# Altium PCB FK723MK1_ZGT6_Large.PcbDoc
Units mm, origin at the board's own origin, x right, y up, seen from the top; angles counter-clockwise.
Board outline 115 x 75 mm, 4 copper layers (Top Layer, GND, +3V3, Bottom Layer), stack 1.652 mm thick; 28 components, 122 nets, 212 pads, 26 vias.
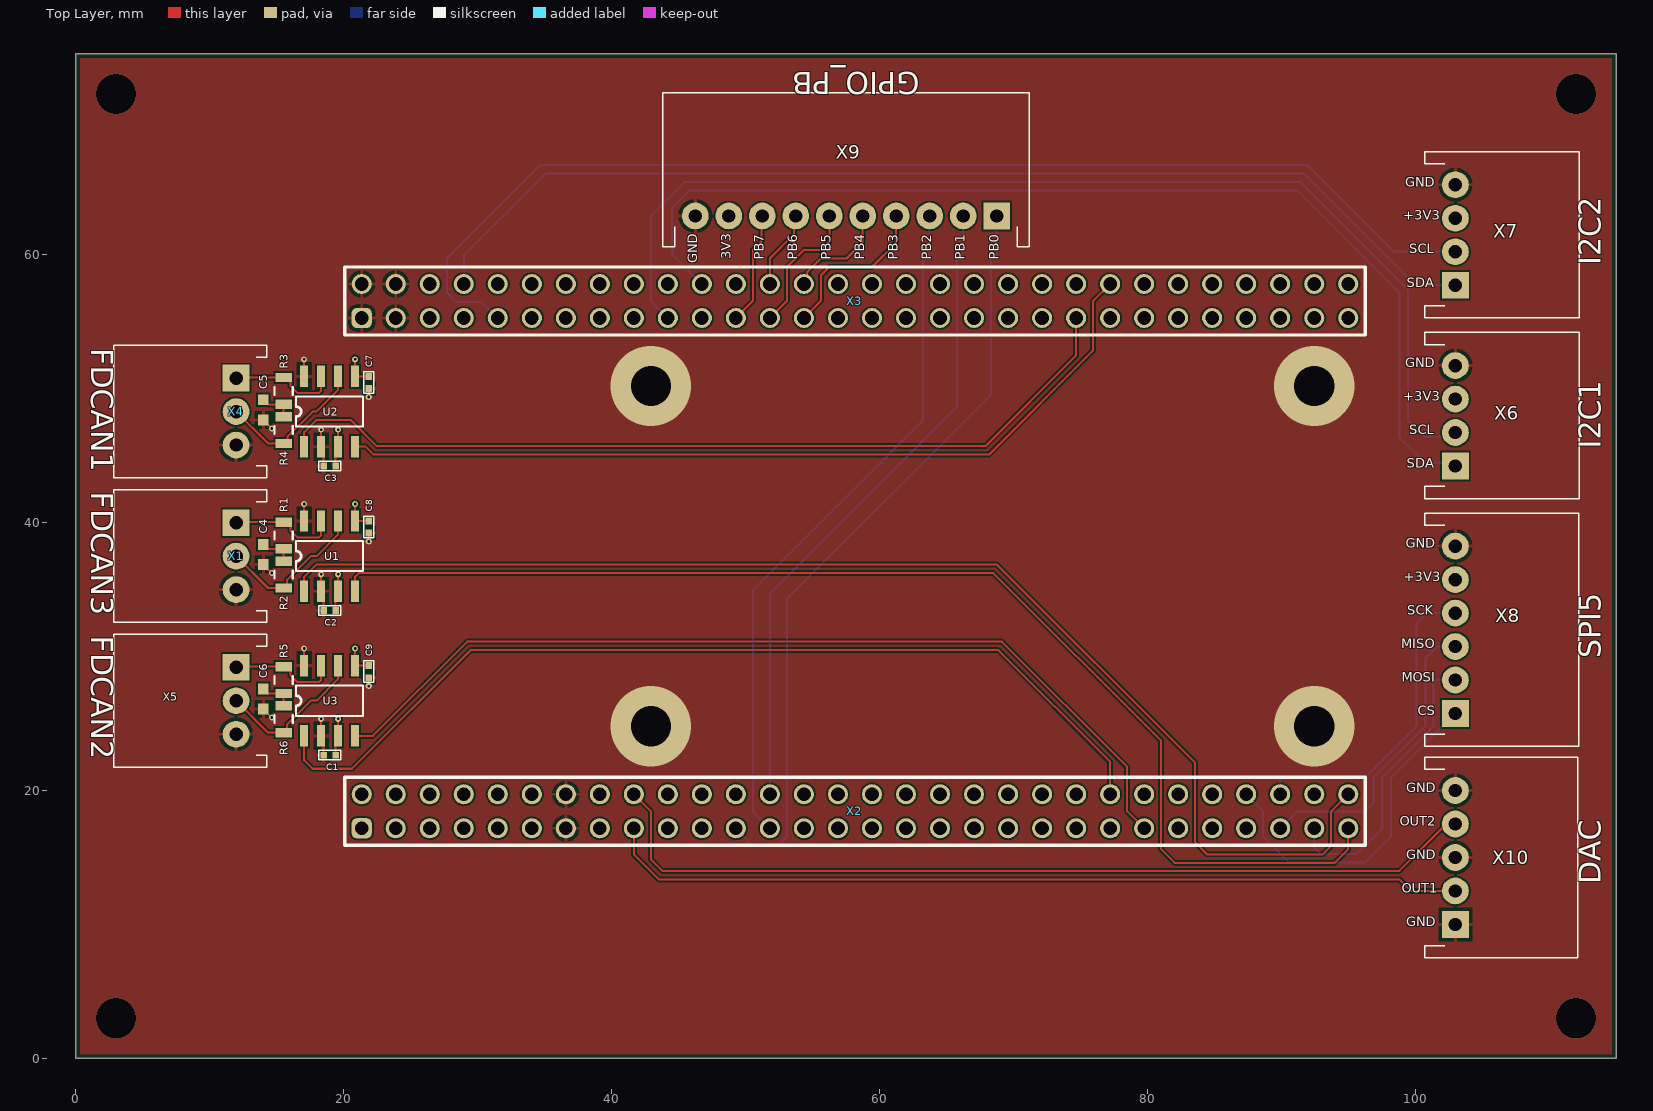
[diagram p0: Top Layer view]
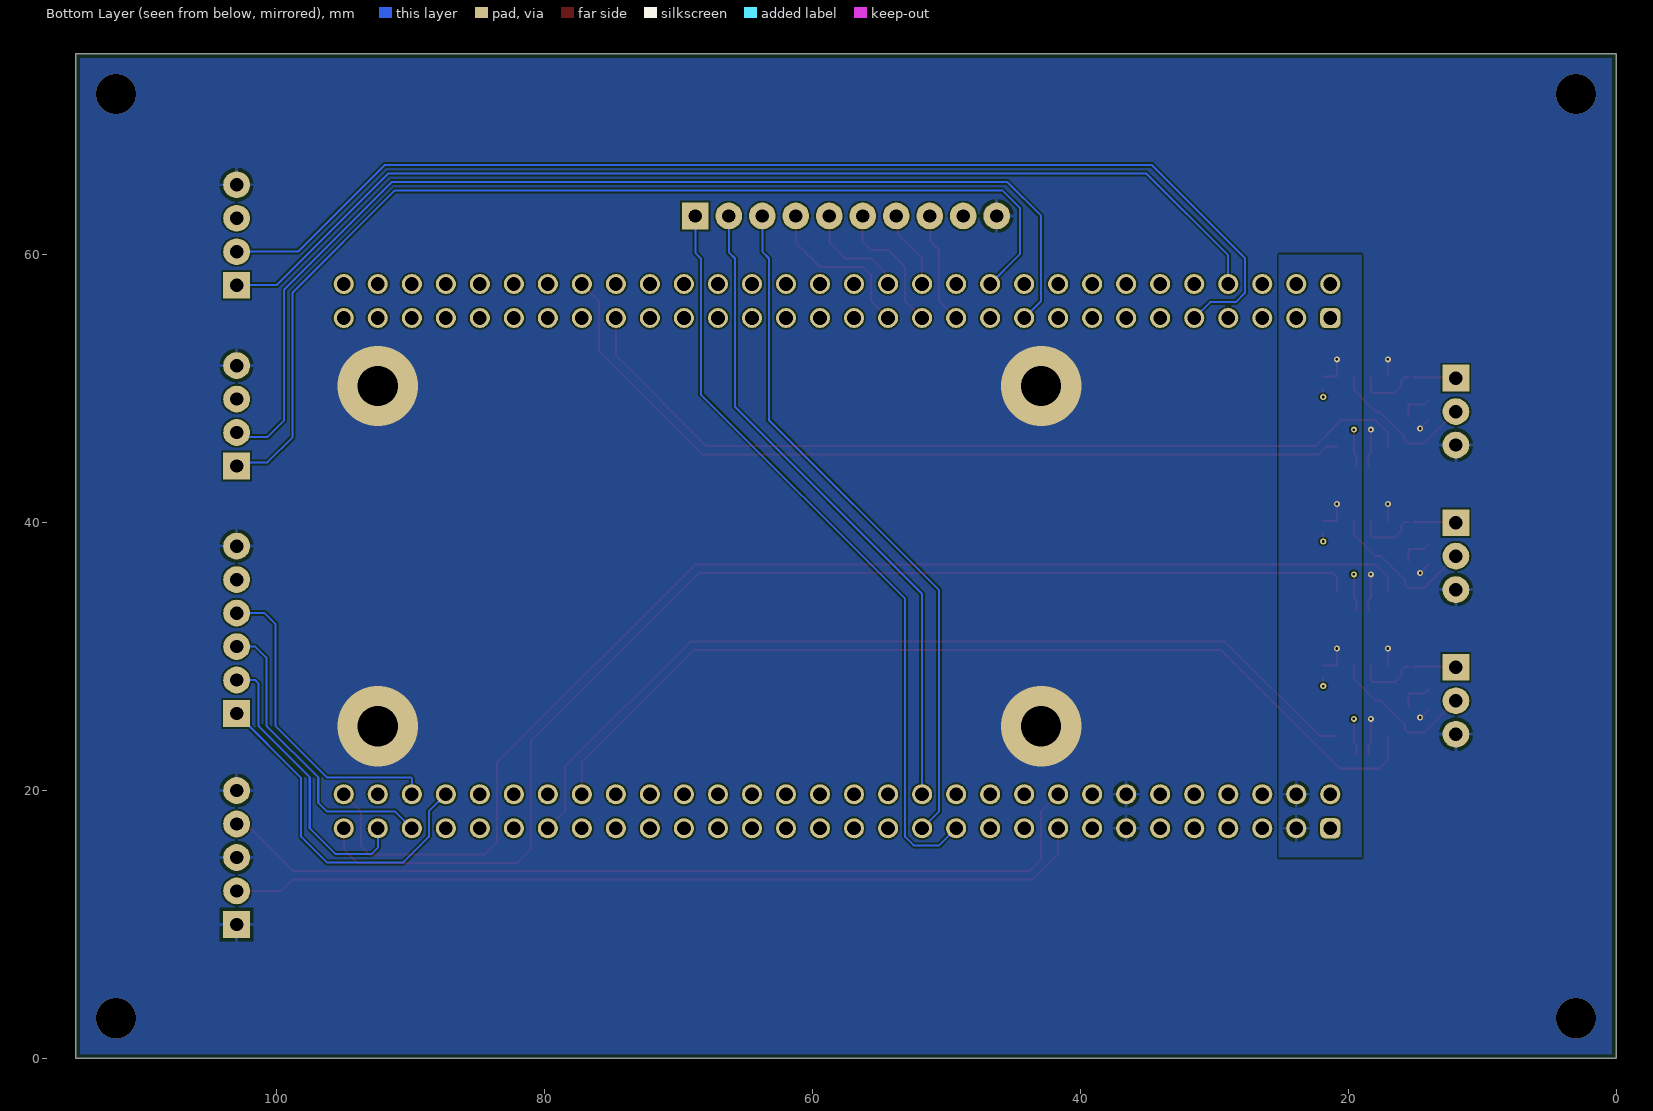
[diagram p1: Bottom Layer view, seen from below]
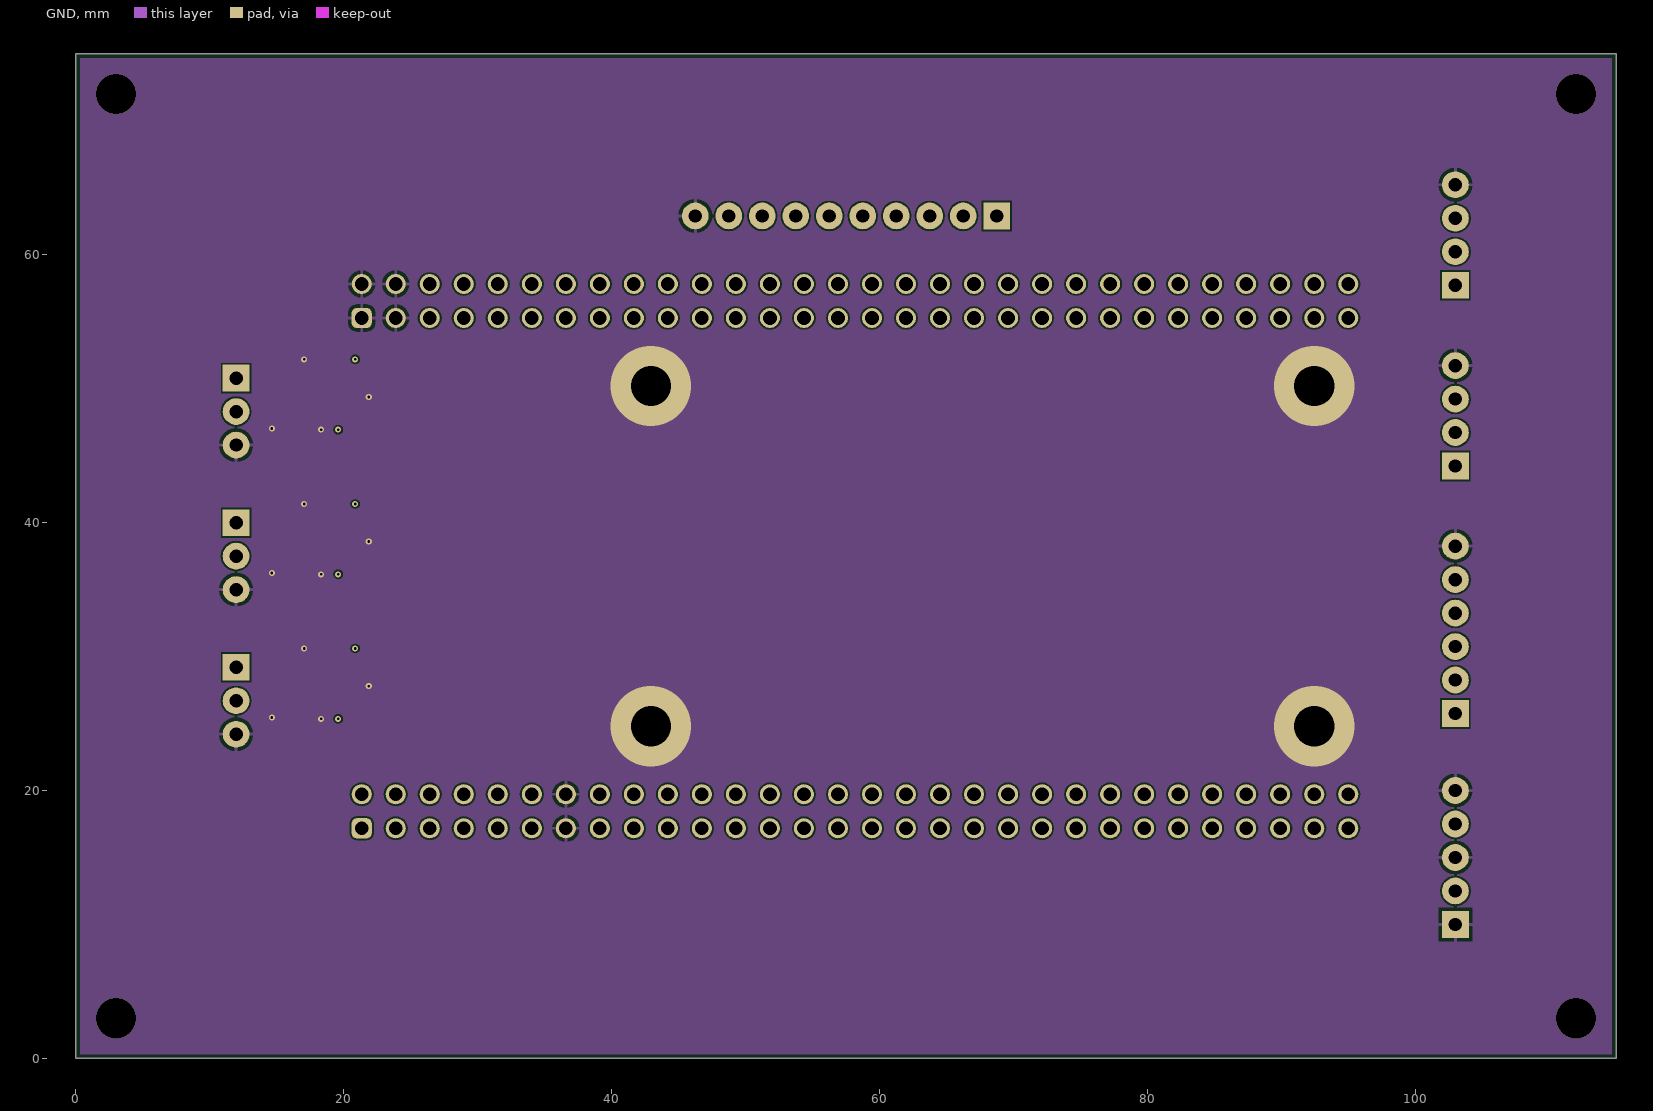
[diagram p2: GND]
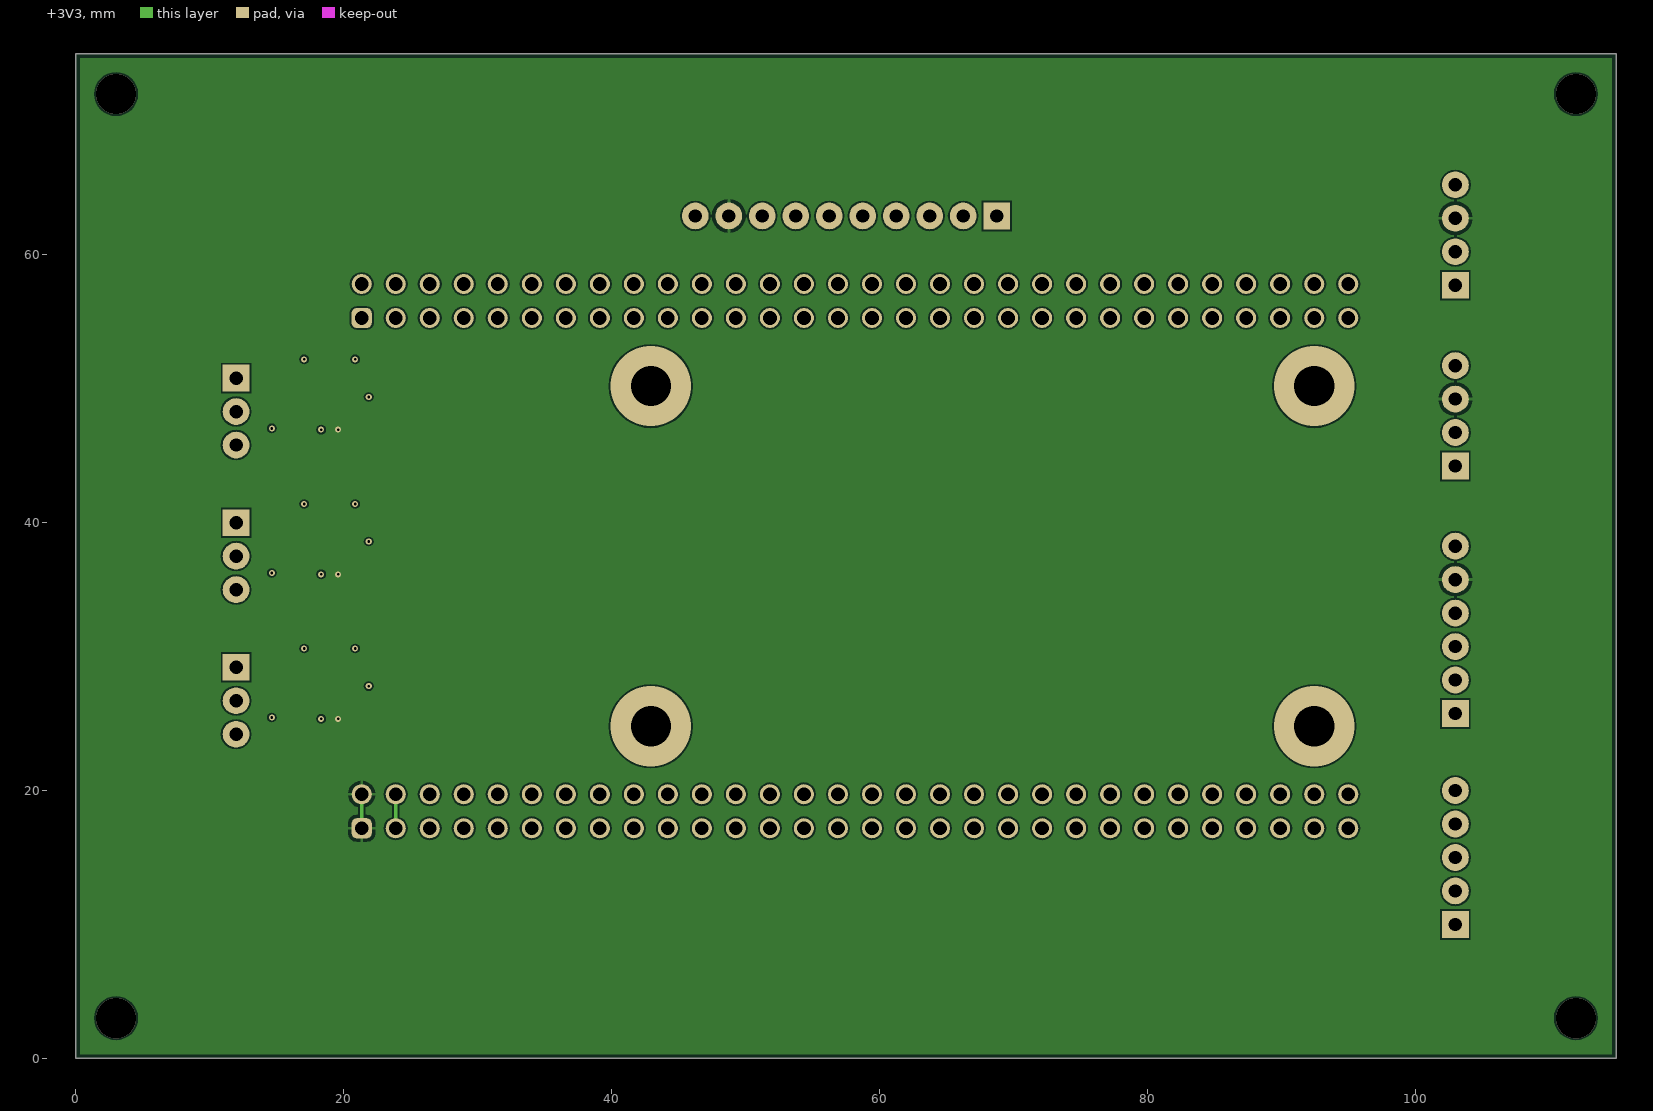
[diagram p3: +3V3]
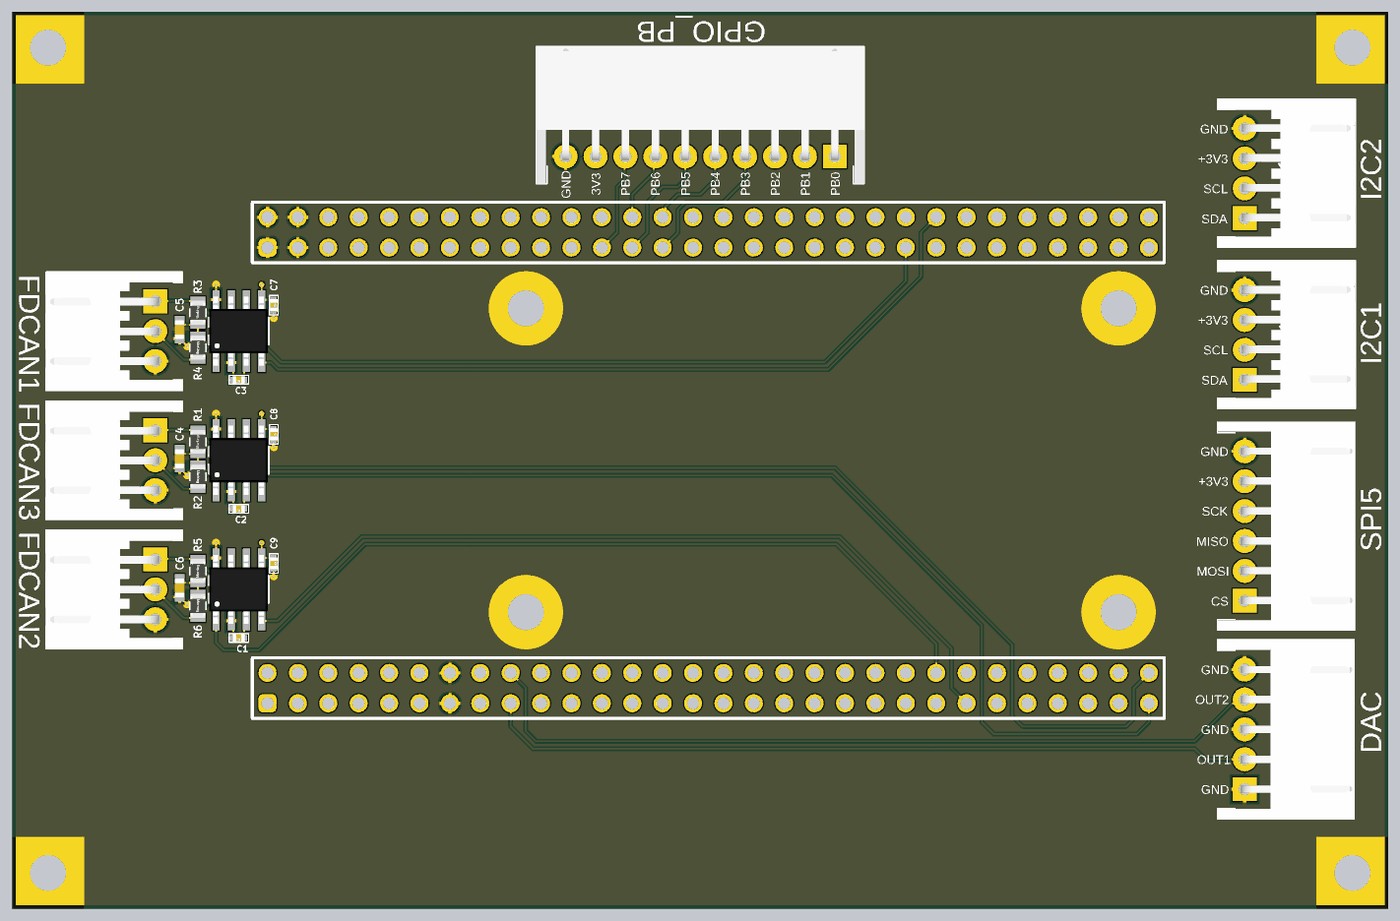
[diagram p4: 3D render of the assembled board from above, using the file's embedded part models]

## Layer stack, top to bottom
Top Solder: solder mask 0.0102, Solder Resist, Dk 3.5
Top Layer: signal copper 0.035
Prepreg 2x1080: core 0.156, FR-4, Dk 4.2
GND: signal copper 0.035
Core: prepreg 1.2, Dk 4.2
+3V3: signal copper 0.035
Prepreg 2x1080: core 0.156, Dk 4.2
Bottom Layer: signal copper 0.035
Bottom Solder: solder mask 0.0102, Solder Resist, Dk 3.5

## Board outline
0,0 0,75 115,75 115,0

## Design rules (kind name [scope] priority, off if disabled: settings)
BoardOutlineClearance [All] p1: gap=0.3 ignorepadtopadclearanceinfootprint=FALSE
Clearance [All] p1: gap=0.125 ignorepadtopadclearanceinfootprint=FALSE
FabricationTestPointUsage TestPointUsage [All] p1: valid=0 allowmultiple=FALSE
FabricationTestpoint Testpoint [All] p1: side=3 testpointundercomponent=TRUE minsize=1.016 maxsize=2.54 preferedsize=1.524 minholesize=0 maxholesize=1.016 preferedholesize=0.813 testpointgrid=0.025 allowsidetop=TRUE allowsidebottom=TRUE usegrid=TRUE gridtolerance=0
HoleSize [All] p1: absolutevalues=TRUE maxlimit=5.08 minlimit=0.025 maxpercent=80.000 minpercent=20.000
PolygonConnect PolygonConnect_Via [isVia] p1: connectstyle=Direct reliefconductorwidth=0.254 reliefentries=4 polygonreliefangle="90 Angle" airgapwidth=0.254
PolygonConnect PolygonConnect_Hole [HasFootprint('M2')] p2: connectstyle=Direct reliefconductorwidth=0.254 reliefentries=4 polygonreliefangle="90 Angle" airgapwidth=0.254
PolygonConnect [All] p3: connectstyle=Relief reliefconductorwidth=0.254 reliefentries=4 polygonreliefangle="90 Angle" airgapwidth=0.254
RoutingVias [All] p1: holewidth=0.4 width=0.8 viastyle="Through Hole" minholewidth=0.4 minwidth=0.8 maxholewidth=0.8 maxwidth=1.27
SilkToSolderMaskClearance SilkscreenOverComponentPads [IsPad] p1: minsilkscreentomaskgap=0.254 clearancetoexposedcopper=TRUE
SolderMaskExpansion [All] p1: expansion=0.102 istentingtop=FALSE
SupplyNets "Schematic Supply Nets_8" [InNet('FDCAN3_RX')] p1: voltage=0.000
SupplyNets "Schematic Supply Nets_7" [InNet('FDCAN3_TX')] p2: voltage=0.000
SupplyNets "Schematic Supply Nets_6" [InNet('FDCAN1_RX')] p3: voltage=0.000
SupplyNets "Schematic Supply Nets_5" [InNet('FDCAN1_TX')] p4: voltage=0.000
SupplyNets "Schematic Supply Nets_4" [InNet('FDCAN2_TX')] p5: voltage=0.000
SupplyNets "Schematic Supply Nets_3" [InNet('FDCAN2_RX')] p6: voltage=0.000
SupplyNets "Schematic Supply Nets_2" [InNet('+5V0')] p7: voltage=0.000
SupplyNets "Schematic Supply Nets_1" [InNet('+3V3')] p8: voltage=0.000
SupplyNets "Schematic Supply Nets" [InNet('GND')] p9: voltage=0.000
UnpouredPolygon [All] p1: allowunpoured=TRUE
Width [All] p1: maxlimit=2 minlimit=0.125 preferedwidth=0.254 minimp=50.000000 maximp=50.000000 favimp=50.000000
25 further rules are at their usual default settings.

## Components (designator, comment, footprint, x,y, rotation, side; value= is the part's Value field where it differs from the comment)
C1 "100nF" 0402 18.945,22.641 r180 top
C2 "100nF" 0402 18.945,33.436 r180 top
C3 "100nF" 0402 18.945,44.231 r180 top
C4 "1nF" WCAP-CSGP_0603_L1.6W0.8H0.8_Reflow 13.992,37.627 r90 top
C5 "1nF" WCAP-CSGP_0603_L1.6W0.8H0.8_Reflow 13.992,48.422 r90 top
C6 "1nF" WCAP-CSGP_0603_L1.6W0.8H0.8_Reflow 13.992,26.832 r90 top
C7 "100nF" 0402 21.866,50.47 r270 top
C8 "100nF" 0402 21.866,39.675 r270 top
C9 "100nF" 0402 21.866,28.88 r270 top
R1 "60R" WRIS-KSKE_0805 15.516,39.04 r90 top
R2 "60R" WRIS-KSKE_0805 15.516,36.119 r270 top
R3 "60R" WRIS-KSKE_0805 15.516,49.835 r90 top
R4 "60R" WRIS-KSKE_0805 15.516,46.914 r270 top
R5 "60R" WRIS-KSKE_0805 15.516,28.245 r90 top
R6 "60R" WRIS-KSKE_0805 15.516,25.324 r270 top
U1 "TJA1051T/3" SO-8 18.945,37.5 r0 top locked
U2 "TJA1051T/3" SO-8 18.945,48.295 r0 top locked
U3 "TJA1051T/3" SO-8 18.945,26.705 r0 top locked
X1 "JST_XH 3polig" "JST_XH 3polig, liegend" 11.96,37.5 r270 top locked
X2 "Buchsenleiste 2x30" "Buchsenleiste 2x30polig" 21.34,17.18 r0 top locked
X3 "Buchsenleiste 2x30" "Buchsenleiste 2x30polig" 21.34,55.28 r0 top locked
X4 "JST_XH 3polig" "JST_XH 3polig, liegend" 11.96,48.295 r270 top locked
X5 "JST_XH 3polig" "JST_XH 3polig, liegend" 11.96,26.705 r270 top locked
X6 "JST_XH 4polig liegend" "JST_XH 4polig, liegend" 103,48 r90 top
X7 "JST_XH 4polig liegend" "JST_XH 4polig, liegend" 103,61.5 r90 top
X8 "JST_XH 6polig liegend" "JST_XH 6polig, liegend" 102.999,32 r90 top
X9 "JST_XH 10polig liegend" "JST_XH 10polig, liegend" 57.5,62.9 r180 top
X10 "JST_XH 5polig liegend" "JST_XH 5polig, liegend" 102.999,15 r90 top

## Footprints (in the part's own frame and the unit in brackets; to place one, negate y for a bottom-side part, rotate by r counter-clockwise, add the part's x,y. Pads: shape width x height; smd on the part's side, far side on the other; paste and mask are expansions set on the pad)
0402 [mm] "Chip Capacitor, 2-Leads, Body 3.50x2.50mm, IPC Medium Density"
  rect 0.5x0.5 smd mask+0.05: 1(-0.45,0) 2(0.45,0)
  silkscreen extent -0.81,-0.36 0.81,0.36, body extent -0.5,-0.3 0.5,0.3, height 0.2
"Buchsenleiste 2x30polig" [mm] "Buchsenleiste 2x30polig"
  rrect50% 1.5x1.5 hole 1.02: 1(0,0)
  round 1.5 hole 1.02: 2(0,2.54) 3(2.54,0) 4(2.54,2.54) 5(5.08,0) 6(5.08,2.54) 7(7.62,0) 8(7.62,2.54) 9(10.16,0) 10(10.16,2.54) 11(12.7,0) 12(12.7,2.54) 13(15.24,0) 14(15.24,2.54) 15(17.78,0) 16(17.78,2.54) 17(20.32,0) 18(20.32,2.54) 19(22.86,0) 20(22.86,2.54) 21(25.4,0) 22(25.4,2.54) 23(27.94,0) 24(27.94,2.54) 25(30.48,0) 26(30.48,2.54) 27(33.02,0) 28(33.02,2.54) 29(35.56,0) 30(35.56,2.54) 31(38.1,0) 32(38.1,2.54) 33(40.64,0) 34(40.64,2.54) 35(43.18,0) 36(43.18,2.54) 37(45.72,0) 38(45.72,2.54) 39(48.26,0) 40(48.26,2.54) 41(50.8,0) 42(50.8,2.54) 43(53.34,0) 44(53.34,2.54) 45(55.88,0) 46(55.88,2.54) 47(58.42,0) 48(58.42,2.54) 49(60.96,0) 50(60.96,2.54) 51(63.5,0) 52(63.5,2.54) 53(66.04,0) 54(66.04,2.54) 55(68.58,0) 56(68.58,2.54) 57(71.12,0) 58(71.12,2.54) 59(73.66,0) 60(73.66,2.54)
  silkscreen extent -1.27,-1.27 74.93,3.81
"JST_XH 3polig, liegend" [mm] "JST_XH 3polig, liegend"
  rect 2x2 hole 1: 1(-2.5,0)
  round 2 hole 1: 2(0,0) 3(2.5,0)
  silkscreen extent -4.95,-9.14 4.95,2.29, body extent -4.95,-9.18 4.95,2.33, height 5.72
"JST_XH 4polig, liegend" [mm] "JST_XH 4polig, liegend"
  rect 2x2 hole 1: 1(-3.77,0)
  round 2 hole 1: 2(-1.27,0) 3(1.23,0) 4(3.73,0)
  silkscreen extent -6.2,-9.25 6.2,2.29, body extent -6.2,-9.25 6.2,2.26, height 5.75
"JST_XH 5polig, liegend" [mm] "JST_XH 5polig, liegend"
  rect 2x2 hole 1: 1(-5,0)
  round 2 hole 1: 2(-2.5,0) 3(0,0) 4(2.5,0) 5(5,0)
  silkscreen extent -7.5,-9.14 7.5,2.29, body extent -7.45,-9.17 7.45,2.33, height 6.1
"JST_XH 6polig, liegend" [mm] "JST_XH 6polig, liegend"
  rect 2x2 hole 1: 1(-6.25,0)
  round 2 hole 1: 2(-3.75,0) 3(-1.25,0) 4(1.25,0) 5(3.75,0) 6(6.25,0)
  silkscreen extent -8.7,-9.2 8.7,2.29, body extent -8.68,-9.2 8.72,2.3, height 6.1
"JST_XH 10polig, liegend" [mm] "JST_XH 10polig, liegend"
  rect 2x2 hole 1: 1(-11.25,0)
  round 2 hole 1: 2(-8.75,0) 3(-6.25,0) 4(-3.75,0) 5(-1.25,0) 6(1.25,0) 7(3.75,0) 8(6.25,0) 9(8.75,0) 10(11.25,0)
  silkscreen extent -13.7,-9.2 13.7,2.29, body extent -13.7,-9.22 13.7,2.28, height 6.1
SO-8 [mm]
  rect 0.6x1.6 smd: 1(-1.905,-2.625) 2(-0.635,-2.625) 3(0.635,-2.625) 4(1.905,-2.625) 5(1.905,2.625) 6(0.635,2.625) 7(-0.635,2.625) 8(-1.905,2.625)
  silkscreen extent -2.5,-1.12 2.5,1.13, body extent -2.49,-2.89 2.41,2.89, height 1.45
WCAP-CSGP_0603_L1.6W0.8H0.8_Reflow [mm] "Ceramic Capacitors, body 1.6x0.8mm"
  rect 0.8x0.8 smd: 1(-0.75,0) 2(0.75,0)
  body extent -0.8,-0.4 0.8,0.4, height 0.8
WRIS-KSKE_0805 [mm] "Thick Film Resistors, SMT, body size 2x1.25mm"
  rect 0.7x1.25 smd: 1(-1,0) 2(1,0)
  silkscreen extent -0.3,-0.67 0.3,0.67, body extent -1,-0.62 1,0.63, height 0.6

## Part data
C1 C2 C3 C7 C8 C9: "100nF 16V 10% 0402", Trumpf Nr.=1606554
C4 C5 C6: library part 885012006014, "WCAP-CSGP Multilayer Ceramic Chip Capacitor, General Purpose, size 0603, 1nF, 10V", Capacitance Tolerance=+/-5%, Case/Size Code=0603, Insulation Resistance=10GΩ, Manufacturer="Wurth Elektronik", Max Operating Temperature=125°C, Min Operating Temperature=-55°C, Rated Voltage (DC)=10V, Capacitance=1nF, Category="Multilayer Ceramic Chip Capacitors", Ceramic Type=NP0, ComponentLink1Description="Website Link", ComponentLink1URL=https://www.we-online.com/redexpert/article/885012006014?ad, ComponentLink2Description="Datasheet Link", ComponentLink2URL=https://www.we-online.com/redexpert/spec/885012006014?ad, Height=0.8mm, Length=1.6mm, Manufacturer Part Number=885012006014, Match Code=WCAP-CSGP, Mount="Surface Mount", Packaging="Tape and Reel", Q Factor=1000, Technical Reference=NP00603102J010DFCT10000, Width=0.8mm
R1 R2 R3 R4 R5 R6: library part 560050320001, "WRIS-KSKE Thick Film Resistor, SMT, size 0805, 0.1Ω, 0.33W, +/-1%", Case/Size Code=0805, Manufacturer="Wurth Elektronik", Max Operating Temperature=155°C, Min Operating Temperature=-55°C, Rated Current=1.81A, Rated Power=0.33W, Resistance=0.1Ω, Resistance Tolerance=+/-1%, Temperature Coefficient of Resistance Max=250ppm/°C, Category="Thick Film Resistors", ComponentLink1Description="Website Link", ComponentLink1URL=https://www.we-online.com/redexpert/article/560050320001?ad, ComponentLink2Description="Datasheet Link", ComponentLink2URL=https://www.we-online.com/redexpert/spec/560050320001?ad, Height=0.6mm, Length=2mm, Manufacturer Part Number=560050320001, Match Code=WRIS-KSKE, Mount="Surface Mount", Packaging="Tape and Reel", Width=1.25mm
X6 X7: library part "JST_XH 4polig"
X8: library part "JST_XH 6polig"
X9: library part "JST_XH 10polig"
X10: library part "JST_XH 5polig"

## Via types
v1: diameter 0.45, hole 0.2, Top Layer to Bottom Layer, 18 vias
v2: diameter 6, hole 3, Top Layer to Bottom Layer, 4 vias
v3: diameter 3, hole 3, Top Layer to Bottom Layer, 4 vias

## Nets (pads, with @x,y where several pads share a name; then routed paths per layer and width w, separated by ;. In a path a pad name is that pad's centre, name@x,y a point inside that pad or via, vN(x,y) a via of type N, cw(c..) or ccw(c..) an arc to the next point about the centre after c; other vN are vias at no path point)
+3V3: C1.1 C2.1 C3.1 U1.3 U2.3 U3.3 X2.1 X2.2 X6.3 X7.3 X8.5 X9.9 | length 10.9
  Top Layer w0.15: C1.1 19.395,23.395 19.58,23.58 U3.3 v1(19.58,25.35) ; C2.1 19.395,34.19 19.58,34.375 U1.3 v1(19.58,36.145) ; C3.1 19.395,44.985 19.58,45.17 U2.3 v1(19.58,46.94)
  +3V3 w0.254: X2.1 X2.2
+5V0: C7.1 C8.1 C9.1 U1.5 U2.5 U3.5 X2.3 X2.4 | length 9.4
  Top Layer w0.15: v1(20.85,30.6) U3.5 C9.1 ; v1(20.85,41.395) U1.5 C8.1 ; v1(20.85,52.19) U2.5 C7.1
  +3V3 w0.254: X2.3 X2.4
CANH_3: R1.2 U1.7 X1.1 | length 7.8
  Top Layer w0.15: X1.1@12,40.04 R1.2@15.135,40.04 ; R1.2 15.791,40.04 16.014,39.817 16.014,39.415 16.532,38.897 18.161,38.897 18.31,39.046 U1.7
CANL_3: R2.2 U1.6 X1.2 | length 11.5
  Top Layer w0.15: X1.2 14.341,35.119 15.526,35.119 15.749,35.342 15.749,35.701 17.548,37.5 17.969,37.5 19.562,39.093 19.562,40.107 U1.6
DAC1_OUT1: X2.17 X10.2 | length 64.4
  Top Layer w0.15: X2.17 41.66,15.23 43.52,13.37 98.81,13.37 99.68,12.5 X10.2
DAC1_OUT2: X2.18 X10.4 | length 67.2
  Top Layer w0.15: X2.18@41.668,19.712 42.926,18.454 42.926,14.862 43.783,14.005 98.81,14.005 101.971,17.166 102.665,17.166 X10.4
FDCAN1_RX: U2.4 X3.46 | length 64.1
  Top Layer w0.15: U2.4 21.64,45.67 22.225,45.085 68.178,45.085 75.958,52.864 75.958,56.558 X3.46
FDCAN1_TX: U2.1 X3.43 | length 65.5
  Top Layer w0.15: U2.1 17.04,46.758 17.942,47.66 20.539,47.66 22.479,45.72 67.915,45.72 74.68,52.485 X3.43
FDCAN2_RX: U3.4 X2.47 | length 69.5
  Top Layer w0.15: U3.4 22.175,24.08 29.21,31.115 69.135,31.115 78.49,21.76 78.49,18.45 X2.47
FDCAN2_TX: U3.1 X2.46 | length 71.8
  Top Layer w0.15: U3.1 17.04,22.26 17.675,21.625 20.609,21.625 29.464,30.48 68.872,30.48 77.22,22.132 X2.46
FDCAN3_RX: U1.4 X2.59 | length 91
  Top Layer w0.15: U1.4 20.85,35.976 21.104,36.23 38.104,36.23 67.441,36.23 68.51,36.23 81.03,23.711 81.03,15.617 82.042,14.605 93.98,14.605 95,15.625 X2.59
FDCAN3_TX: U1.1 X2.60 | length 95.2
  Top Layer w0.15: U1.1 17.042,34.877 17.042,35.956 17.951,36.865 34.951,36.865 67.822,36.865 68.774,36.865 83.57,22.069 83.57,16.125 84.455,15.24 93.091,15.24 93.726,15.875 93.726,18.446 X2.60
GND: C1.2 C2.2 C3.2 C4.1 C5.1 C6.1 C7.2 C8.2 C9.2 U1.2 U1.8 U2.2 U2.8 U3.2 U3.8 X1.3 X2.13 X2.14 X3.1 X3.2 X3.3 X3.4 X4.3 X5.3 X6.4 X7.4 X8.6 X9.10 X10.1 X10.3 X10.5 | length 16.6
  Top Layer w0.15: C6.1 v1@14.589,25.485 ; C4.1 v1@14.589,36.28 ; C5.1 v1@14.589,47.075 ; U3.8 v1(17.04,30.6) ; U1.8 v1(17.04,41.395) ; U2.8 v1(17.04,52.19) ; v1(18.31,25.35) U3.2 18.31,23.58 18.495,23.395 C1.2 ; v1(18.31,36.145) U1.2 18.31,34.375 18.495,34.19 C2.2 ; v1(18.31,46.94) U2.2 18.31,45.17 18.495,44.985 C3.2 ; v1(21.866,27.795) C9.2 ; v1(21.866,38.59) C8.2 ; v1(21.866,49.385) C7.2
  other v1: 14.627,25.447 14.627,36.242 14.627,47.037
  other v2: 42.93,24.8 92.46,24.8 42.93,50.2 92.46,50.2
  other v3: 3,3 112,3 3,72 112,72
GPIO_PB0: X2.23 X9.1 | length 57.4
  Bottom Layer w0.15: X2.23 50.55,15.91 52.455,15.91 53.09,16.545 53.09,34.325 68.33,49.565 68.33,59.725 68.75,60.145 X9.1
GPIO_PB1: X2.26 X9.2 | length 49.8
  Bottom Layer w0.15: X2.26 51.82,34.675 65.79,48.645 65.79,59.725 66.25,60.185 X9.2 ; X9.2@65.79,62.22 X9.2@66.25,62.68
GPIO_PB2: X2.25 X9.3 | length 52.4
  Bottom Layer w0.15: X2.25 50.55,18.45 50.55,34.96 63.25,47.66 63.25,49.28 63.25,59.725 63.75,60.225 X9.3 ; X9.3@63.25,62.22 X9.3@63.75,62.72
GPIO_PB3: X3.27 X9.4 | length 12.3
  Top Layer w0.15: X3.27@54.368,55.288 55.63,56.55 55.63,58.455 56.265,59.09 59.44,59.09 61.25,60.9 X9.4
GPIO_PB4: X3.28 X9.5 | length 8
  Top Layer w0.15: X3.28 54.588,58.048 54.588,58.683 55.63,59.725 57.535,59.725 58.75,60.94 X9.5
GPIO_PB5: X3.25 X9.6 | length 10.2
  Top Layer w0.15: X3.25 53.09,56.55 53.09,59.09 54.36,60.36 55.63,60.36 56.25,60.98 X9.6
GPIO_PB6: X3.26 X9.7 | length 5.9
  Top Layer w0.15: X3.26 51.82,59.725 53.614,61.519 53.614,62.764 X9.7
GPIO_PB7: X3.23 X9.8 | length 8.4
  Top Layer w0.15: X3.23 50.55,56.55 50.55,60.36 51.185,60.995 51.185,62.835 X9.8
I2C1_SCL: X3.19 X6.2 | length 83
  Bottom Layer w0.15: X3.19 42.93,56.55 42.93,62.9 45.465,65.435 91.417,65.435 99.445,57.407 99.445,47.66 100.715,46.39 101.978,46.39 101.984,46.396 102.666,46.396 X6.2
I2C1_SDA: X3.22 X6.1 | length 80.4
  Bottom Layer w0.15: X3.22 44.515,60.045 44.515,63.5 45.82,64.805 91.19,64.805 98.81,57.185 98.81,46.39 100.7,44.5 X6.1@103,44.5
I2C2_SCL: X3.9 X7.2 | length 88
  Bottom Layer w0.15: X3.9 30.318,56.462 28.413,56.462 27.69,57.185 27.69,59.725 34.67,66.705 91.943,66.705 98.418,60.23 X7.2
I2C2_SDA: X3.8 X7.1 | length 82.2
  Bottom Layer w0.15: X3.8 28.96,59.96 35.07,66.07 91.68,66.07 100.02,57.73 X7.1
NetC4_2: C4.2 R1.1 R2.1 | length 2.6
  Top Layer w0.15: C4.2 14.329,38.04 R1.1 R2.1
NetC5_2: C5.2 R3.1 R4.1 | length 2.6
  Top Layer w0.15: C5.2 14.329,48.835 R3.1 R4.1
NetC6_2: C6.2 R5.1 R6.1 | length 2.6
  Top Layer w0.15: C6.2 14.329,27.245 R5.1 R6.1
NetR3_2: R3.2 U2.7 X4.1 | length 7.8
  Top Layer w0.15: X4.1 12,50.835 R3.2@15.135,50.835 ; R3.2 15.791,50.835 16.014,50.612 16.014,50.21 16.532,49.692 18.161,49.692 18.31,49.841 U2.7
NetR4_2: R4.2 U2.6 X4.2 | length 11.4
  Top Layer w0.15: X4.2 14.341,45.914 15.526,45.914 15.794,46.182 15.794,46.401 17.676,48.283 17.949,48.283 19.562,49.895 19.562,50.902 U2.6
NetR5_2: R5.2 U3.7 X5.1 | length 7.8
  Top Layer w0.15: X5.1@12,29.245 R5.2@15.135,29.245 ; R5.2 15.791,29.245 16.014,29.022 16.014,28.62 16.532,28.102 18.161,28.102 18.31,28.251 U3.7
NetR6_2: R6.2 U3.6 X5.2 | length 11.5
  Top Layer w0.15: X5.2 14.341,24.324 15.526,24.324 15.749,24.547 15.749,24.906 17.548,26.705 17.969,26.705 19.562,28.298 19.562,29.312 U3.6
PA0: X2.10
PA1: X2.9
PA2: X2.11
PA3: X2.20
PA6: X2.19
PA7: X2.22
PA8: X3.47
PA9: X3.6
PA10: X3.5
PA11: X2.5
PA12: X2.6
PA15: X3.44
PB10: X2.44
PB11: X2.42
PB14: X2.45
PB15: X2.48
PC0: X2.8
PC1: X2.7
PC2_C: X2.15
PC3_C: X2.16
PC4: X2.21
PC5: X2.24
PC6: X3.51
PC7: X3.52
PC8: X3.49
PC9: X3.50
PC10: X3.41
PC11: X3.48
PC12: X3.45
PC13: X3.7
PD2: X3.42
PD3: X3.39
PD4: X3.40
PD5: X3.37
PD6: X3.38
PD7: X3.35
PD8: X2.49
PD9: X2.50
PD10: X2.51
PD11: X2.52
PD14: X3.59
PD15: X3.60
PE0: X3.21
PE1: X3.24
PE2: X3.20
PE3: X3.17
PE4: X3.18
PE5: X3.15
PE6: X3.16
PE7: X2.33
PE8: X2.35
PE9: X2.36
PE10: X2.37
PE11: X2.38
PE12: X2.39
PE13: X2.40
PE14: X2.41
PE15: X2.43
PF2: X3.10
PF3: X3.12
PF4: X3.11
PF5: X3.14
PF10: X2.53
PF11: X2.28
PF12: X2.27
PF13: X2.30
PF14: X2.29
PF15: X2.32
PG0: X2.31
PG1: X2.34
PG2: X3.57
PG3: X3.58
PG4: X3.55
PG5: X3.56
PG6: X2.58
PG7: X3.53
PG8: X3.54
PG9: X3.36
PG10: X3.33
PG11: X3.34
PG12: X3.31
PG13: X3.32
PG14: X3.29
PG15: X3.30
SPI5_MISO: X2.55 X8.3 | length 22.8
  Bottom Layer w0.15: X2.55 91.19,18.45 96.27,18.45 96.905,19.085 96.905,20.977 100.777,24.849 100.777,29.929 101.598,30.75 X8.3
SPI5_MOSI: X2.57 X8.2 | length 21.6
  Bottom Layer w0.15: X2.57 92.46,15.734 92.919,15.275 95.635,15.275 97.54,17.18 97.54,20.99 101.35,24.8 101.35,27.975 101.625,28.25 X8.2
SPI5_SCK: X2.56 X8.4 | length 23.8
  Bottom Layer w0.15: X2.56 89.92,20.902 90.008,20.99 96.27,20.99 100.08,24.8 100.08,32.42 100.91,33.25 X8.4
VBAT: X3.13
VREF: X2.12
~CS: X2.54 X8.1 | length 26
  Bottom Layer w0.15: X2.54 88.65,18.45 88.65,16.545 90.555,14.64 96.27,14.64 98.175,16.545 98.175,20.926 X8.1

## Polygon pours and split planes (outlines as drawn)
GND on Bottom Layer "TOP" (solid, pour order 11): 0,0 0,75 115,75 115,0
+5V0 on Bottom Layer "Bottom Layer-+5V0" (solid, pour order 6): 19,15 19,60 25.175,60 25.175,15
GND on Top Layer "TOP" (solid, pour order 8): 0,0 0,75 115,75 115,0
GND on GND "TOP" (solid, pour order 9): 0,0 0,75 115,75 115,0
+3V3 on +3V3 "TOP" (solid, pour order 10): 0,0 0,75 115,75 115,0

## Silkscreen, mask and mechanical layers (free items; w line width, h text height)
Top Overlay:
  text "GPIO_PB" at 62.992,74.179 h2.8 r180
  text "GND" at 99.268,64.826 h1.2
  text "+3V3" at 99.111,62.337 h1.2
  text "SCL" at 99.538,59.836 h1.2
  text "3V3" at 49.15,59.665 h1.2 r90
  text "PB7" at 51.613,59.614 h1.2 r90
  text "PB6" at 54.122,59.614 h1.2 r90
  text "PB5" at 56.63,59.614 h1.2 r90
  text "PB4" at 59.131,59.614 h1.2 r90
  text "PB3" at 61.64,59.614 h1.2 r90
  text "PB2" at 64.143,59.614 h1.2 r90
  text "PB1" at 66.643,59.614 h1.2 r90
  text "PB0" at 69.152,59.614 h1.2 r90
  text "GND" at 46.651,59.385 h1.2 r90
  text "I2C2" at 114.402,59.217 h2.8 r90
  text "SDA" at 99.379,57.315 h1.2
  text "FDCAN1" at 0.588,53.01 h2.8 r270
  text "GND" at 99.268,51.338 h1.2
  text "+3V3" at 99.111,48.85 h1.2
  text "SCL" at 99.538,46.349 h1.2
  text "I2C1" at 114.402,45.501 h2.8 r90
  text "SDA" at 99.379,43.828 h1.2
  text "FDCAN3" at 0.588,42.316 h2.8 r270
  text "GND" at 99.292,37.858 h1.2
  text "+3V3" at 99.135,35.37 h1.2
  text "SCK" at 99.407,32.869 h1.2
  text "FDCAN2" at 0.588,31.547 h2.8 r270
  text "MISO" at 98.946,30.348 h1.2
  text "SPI5" at 114.402,29.88 h2.8 r90
  text "MOSI" at 98.995,27.848 h1.2
  text "CS" at 100.181,25.348 h1.2
  text "GND" at 99.341,19.608 h1.2
  text "OUT2" at 98.856,17.119 h1.2
  text "GND" at 99.341,14.608 h1.2
  text "DAC" at 114.402,12.989 h2.8 r90
  text "OUT1" at 98.997,12.098 h1.2
  text "GND" at 99.341,9.608 h1.2
  text "2031588" at 237.75,-49.785 h3.81
  text ".DokumentenNrBestueckungsplan" at 181.489,-63.755 h3.81
Bottom Paste:
  rectangle: 0,-69 6,-63
  rectangle: 109,-69 115,-63
Top Solder:
  rectangle: 109,69 115,75
  rectangle: 109,0 115,6
  rectangle: 0,0 6,6
  rectangle: 0,69 6,75
Bottom Solder:
  rectangle: 0,69 6,75
  rectangle: 109,69 115,75
  rectangle: 109,0 115,6
  rectangle: 0,0 6,6
Mechanical 1:
  the board outline again, w0.254
Mechanical 2:
  text "Leiterplattendaten:" at 180.051,138.069 h1.5
  text "Technik: Zweiseitig SMD" at 180.051,131.719 h1.5
  text "Abmessungen: 51mmx42mm" at 180.051,129.179 h1.5
  text "Kontur: gefraest" at 180.051,126.639 h1.5
  text "*.GM1" at 211.801,126.639 h1.5
  text "Basismaterial: FR4, TG150, 1.55mm" at 180.051,124.099 h1.5
  text "Aufbau: 4-Lagen" at 180.051,120.289 h1.5
  text "Oberflaeche: chem. Gold (ENIG)" at 180.051,90.319 h1.5
  text "Vias Tented: Bottomside" at 180.07,86.91 h1.5
  text "Loetstopplack:" at 180.051,83.509 h1.5
  text "Top Layer" at 180.051,80.969 h1.5
  text "*.GTS" at 211.801,80.969 h1.5
  text "Bottom Layer" at 180.051,78.429 h1.5
  text "*.GBS" at 211.801,78.429 h1.5
  text "Bestueckungsdruck:" at 180.051,74.619 h1.5
  text "Top Layer" at 180.051,72.079 h1.5
  text "ja" at 211.801,72.079 h1.5
  text "Bottom Layer" at 180.051,69.539 h1.5
  text "keiner" at 211.801,69.539 h1.5
  text "Bohrdurchmesser min/max: 0.3mm/3.1mm" at 180.051,65.729 h1.5
  text "kleinste Leiterbildstrucktur: 125um" at 180.07,58.91 h1.5
  text "Herstellercode: kein blankes Kupfer" at 180.045,54.865 h1.5
  text "Elektrischer Test: ja" at 180.07,51.91 h1.5
  text "2375847" at 237.813,-43.626 h3.81
  text ".DokumentenNrLeiterplatte" at 181.489,-63.755 h3.81
Mechanical 4:
  drawing of 1156 lines, arcs and shapes, not listed
  text "Kennzeichnung:" at 180.553,37.833 h1.5
  text "Ettikettenmass: 20x7.5" at 180.553,35.293 h1.5
  text "Schrifthoehe: 1.5mm" at 180.553,32.753 h1.5
  text "Format:" at 180.553,30.213 h1.5
  text "1. Zeile: MMMMMMMVVV" at 180.553,27.673 h1.5
  text "2. Zeile: WWJJ/NNN" at 180.553,25.133 h1.5
  text "3. Zeile: AAAAAAAAAA" at 180.502,22.582 h1.5
  text "M: Materialnummer der fertigen Leiterplatte 7stellig" at 180.553,19.774 h1.5
  text "V: Version" at 180.553,17.234 h1.5
  text "W: Kalenderwoche Produktion" at 180.553,14.694 h1.5
  text "J: Produktionsjahr" at 180.553,12.154 h1.5
  text "N: Laufende Nummer der aktuellen Kalenderwoche" at 180.553,9.614 h1.5
  text "A: Bei Bedarf platinenspezifischer Text max. 10 Zeichen" at 180.477,7.124 h1.5
  text "DM: Datamatrixcode 6x6mm Modulgroesse min. 0,2mm" at 180.451,4.777 h1.5
  text "Inhalt: MMMMMMMVVV WWJJ/NNN AAAAAAAAAA" at 186.243,2.364 h1.5
  text "Beispiel:" at 180.451,-0.216 h1.5
  text "Position der Kennzeichnung:" at 181.086,-11.773 h1.5
Mechanical 13:
  lines w0.1: 19,15 19,60 25.175,60 25.175,15 19,15
Mechanical 16:
  drawing of 1687 lines, arcs and shapes, not listed
  text "1" at -99.308,201.04 h1.27
  text "2" at -50.286,201.04 h1.27
  text "3" at -1.264,201.04 h1.27
  text "4" at 47.758,201.04 h1.27
  text "5" at 96.78,201.04 h1.27
  text "6" at 145.802,201.04 h1.27
  text "7" at 194.824,201.04 h1.27
  text "8" at 243.846,201.04 h1.27
  text "A" at -121.406,167.004 h1.27
  text "A" at 267.214,167.004 h1.27
  text "B" at -121.406,96.646 h1.27
  text "B" at 267.214,93.646 h1.27
  text "C" at -121.406,26.288 h1.27
  text "C" at 267.214,26.288 h1.27
  text "DATUM" at 95.002,-36.196 h1.27
  text "NAME" at 116.338,-36.196 h1.27
  text "BENENNUNG" at 168.916,-36.196 h1.27
  text "MATERIAL-NR." at 239.782,-36.196 h1.27
  text "00" at 129.597,-37.047 h2.54
  text "-" at 137.725,-37.047 h2.54
  text "BEAR." at 84.588,-41.022 h1.27
  text "513mk" at 114.611,-41.386 h2.54
  text "19.03.2018" at 93.601,-41.437 h2
  text "D" at -121.406,-44.07 h1.27
  text "D" at 267.214,-44.07 h1.27
  text ".BoardNameAbkuerzung" at 169.17,-44.578 h3.81
  text "GEPR." at 84.842,-45.086 h1.27
  text "19.03.2018" at 93.601,-45.687 h2
  text "513mk" at 114.611,-45.907 h2.54
  text "GEN." at 84.842,-49.15 h1.27
  text "19.03.2018" at 93.601,-49.437 h2
  text ".BoardName" at 169.17,-49.658 h2.5
  text "513mk" at 114.611,-49.997 h2.54
  text "TRUMPF Schweiz AG" at 101.325,-55.464 h1.27
  text "FORMAT" at 168.408,-57.532 h1.27
  text "DOKUMENT-NR." at 181.108,-57.532 h1.27
  text "BLATT-NR." at 239.02,-57.532 h1.27
  text "von" at 256.292,-57.532 h1.27
  text "Lasertechnik" at 103.357,-57.775 h1.27
  text "TRUMPF Strasse 8" at 101.225,-60.326 h1.27
  text "7214 Gruesch" at 103.511,-62.485 h1.27
  text "A3" at 169.932,-63.882 h3.81
  text "1" at 242.576,-63.882 h3.81
  text "1" at 256.292,-63.882 h3.81
  text "Schweiz" at 106.178,-64.517 h1.27
  text "Copyright by TRUMPF" at 95.002,-70.994 h1.27
  text "VERSION" at 128.53,-70.994 h1.27
  text "AENDERUNGSNR." at 140.214,-70.994 h1.27
  text "GEPR." at 159.264,-70.994 h1.27
  text "2" at -50.286,-75.82 h1.27
  text "3" at -1.264,-75.82 h1.27
  text "4" at 47.758,-75.82 h1.27
  text "5" at 96.78,-75.82 h1.27
  text "6" at 145.802,-75.82 h1.27
  text "7" at 194.824,-75.82 h1.27
  text "8" at 243.846,-75.82 h1.27

## Dimensions
3,3 to 112,3 on Mechanical 2
112,3 to 112,72 on Mechanical 2
0,0 to 115,0 on Mechanical 2
115,0 to 115,75 on Mechanical 2